# Altium PCB Main.PcbDoc (part 1 of 3)
Units mm, origin at the board's own origin, x right, y up, seen from the top; angles counter-clockwise.
Board outline 231.52 x 36.7 mm, 2 copper layers (Top Layer, Bottom Layer); 134 components, 130 nets, 558 pads, 347 vias.
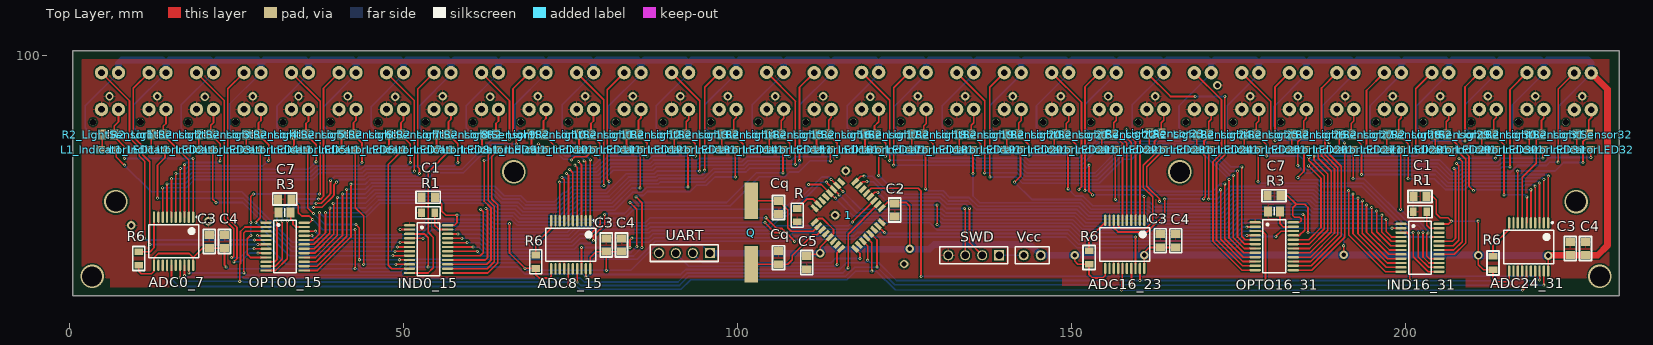
[diagram p0: Top Layer view]
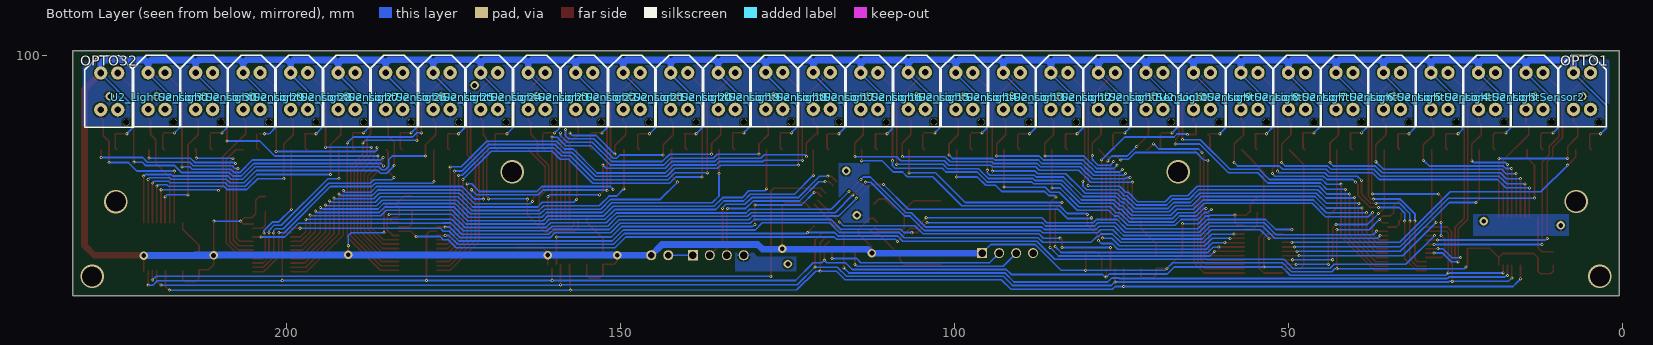
[diagram p1: Bottom Layer view, seen from below]
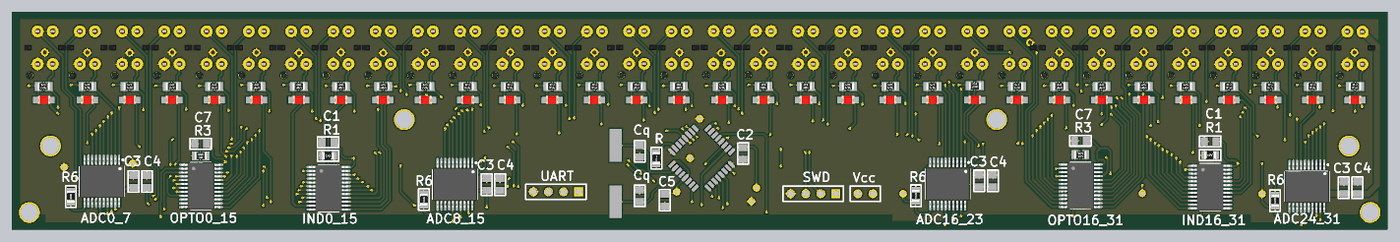
[diagram p3: 3D render of the assembled board from above, using the file's embedded part models]
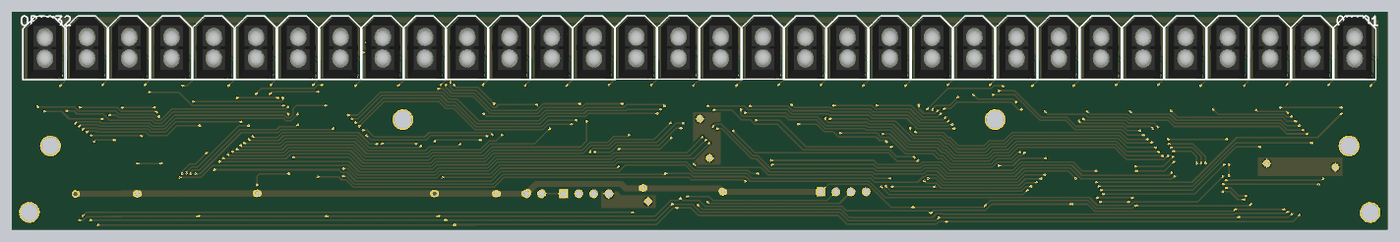
[diagram p4: 3D render of the assembled board from below, using the file's embedded part models]

## Layer stack, top to bottom
Top Solder: solder mask 0.0102, Solder Resist, Dk 3.5
Top Layer: signal copper 0.0356
Dielectric 1: dielectric 0.32, FR-4, Dk 4.8
Bottom Layer: signal copper 0.0356
Bottom Solder: solder mask 0.0102, Solder Resist, Dk 3.5

## Board outline
0.508,64.008 0.508,100.711 232.029,100.711 232.029,64.008

## Design rules (kind name [scope] priority, off if disabled: settings)
Clearance [All] p1: gap=0.254 ignorepadtopadclearanceinfootprint=TRUE
ComponentClearance ComponentClearance_1 [HasFootprint('TCRT5000_NO_HOLE') vs HasFootprint('TCRT5000_NO_HOLE')] p1: gap=0 collisioncheckmode=3 verticalgap=0.254 showdistances=FALSE
ComponentClearance [All] p2: gap=0.254 collisioncheckmode=3 verticalgap=0.254 showdistances=FALSE
HoleSize [All] p1: absolutevalues=TRUE maxlimit=5 minlimit=0.2 maxpercent=80.000 minpercent=20.000
MinimumAnnularRing [All] p1: minimumring=0.1
MinimumSolderMaskSliver [All] p1: minsoldermaskwidth=0
PolygonConnect [All] p1: connectstyle=Relief reliefconductorwidth=0.254 reliefentries=4 polygonreliefangle="90 Angle" airgapwidth=0.254
RoutingVias [All] p1: holewidth=0.2 width=0.45 viastyle="Through Hole" minholewidth=0.2 minwidth=0.45 maxholewidth=100 maxwidth=100
SilkToSilkClearance [All] p1: silktosilkclearance=0
SilkToSolderMaskClearance [IsPad] p1: minsilkscreentomaskgap=0 clearancetoexposedcopper=TRUE
SolderMaskExpansion [All] p1: expansion=0.102
Width [All] p1: maxlimit=1 minlimit=0.254 preferedwidth=0.254
25 further rules are at their usual default settings.

## Classes and differential pairs
channel class SensorControl: OPTO0_15 OPTO16_31
channel class LightSensors: LightSensor1 LightSensor2 LightSensor3 LightSensor4 LightSensor5 LightSensor6 LightSensor7 LightSensor8 LightSensor9 LightSensor10 LightSensor11 LightSensor12 LightSensor13 LightSensor14 LightSensor15 LightSensor16 LightSensor17 LightSensor18 LightSensor19 LightSensor20 LightSensor21 LightSensor22 LightSensor23 LightSensor24 LightSensor25 LightSensor26 LightSensor27 LightSensor28 LightSensor29 LightSensor30 LightSensor31 LightSensor32
channel class IndicatorLEDs: IndicatorLED1 IndicatorLED2 IndicatorLED3 IndicatorLED4 IndicatorLED5 IndicatorLED6 IndicatorLED7 IndicatorLED8 IndicatorLED9 IndicatorLED10 IndicatorLED11 IndicatorLED12 IndicatorLED13 IndicatorLED14 IndicatorLED15 IndicatorLED16 IndicatorLED17 IndicatorLED18 IndicatorLED19 IndicatorLED20 IndicatorLED21 IndicatorLED22 IndicatorLED23 IndicatorLED24 IndicatorLED25 IndicatorLED26 IndicatorLED27 IndicatorLED28 IndicatorLED29 IndicatorLED30 IndicatorLED31 IndicatorLED32
channel class IndicatorControl: IND0_15 IND16_31
channel class ADCs: ADC0_7 ADC8_15 ADC16_23 ADC24_31
net class SENS[1..32]: SENS1 SENS2 SENS3 SENS4 SENS5 SENS6 SENS7 SENS8 SENS9 SENS10 SENS11 SENS12 SENS13 SENS14 SENS15 SENS16 SENS17 SENS18 SENS19 SENS20 SENS21 SENS22 SENS23 SENS24 SENS25 SENS26 SENS27 SENS28 SENS29 SENS30 SENS31 SENS32
net class LED_SENS[1..32]: LED_SENS1 LED_SENS2 LED_SENS3 LED_SENS4 LED_SENS5 LED_SENS6 LED_SENS7 LED_SENS8 LED_SENS9 LED_SENS10 LED_SENS11 LED_SENS12 LED_SENS13 LED_SENS14 LED_SENS15 LED_SENS16 LED_SENS17 LED_SENS18 LED_SENS19 LED_SENS20 LED_SENS21 LED_SENS22 LED_SENS23 LED_SENS24 LED_SENS25 LED_SENS26 LED_SENS27 LED_SENS28 LED_SENS29 LED_SENS30 LED_SENS31 LED_SENS32
net class LED_IND[1..32]: LED_IND1 LED_IND2 LED_IND3 LED_IND4 LED_IND5 LED_IND6 LED_IND7 LED_IND8 LED_IND9 LED_IND10 LED_IND11 LED_IND12 LED_IND13 LED_IND14 LED_IND15 LED_IND16 LED_IND17 LED_IND18 LED_IND19 LED_IND20 LED_IND21 LED_IND22 LED_IND23 LED_IND24 LED_IND25 LED_IND26 LED_IND27 LED_IND28 LED_IND29 LED_IND30 LED_IND31 LED_IND32
component class OPTO16_31: OPTO16_31
component class OPTO0_15: C7 OPTO0_15 R3
component class microcontroller: 1 C2 C5 C_quartz2 Cq Q R SWD UART Vcc
component class LightSensor32: OPTO32 R2_LightSensor32
component class LightSensor31: R2_LightSensor31 U2_LightSensor31
component class LightSensor30: R2_LightSensor30 U2_LightSensor30
component class LightSensor29: R2_LightSensor29 U2_LightSensor29
component class LightSensor28: R2_LightSensor28 U2_LightSensor28
component class LightSensor27: R2_LightSensor27 U2_LightSensor27
component class LightSensor26: R2_LightSensor26 U2_LightSensor26
component class LightSensor25: R2_LightSensor25 U2_LightSensor25
component class LightSensor24: R2_LightSensor24 U2_LightSensor24
component class LightSensor23: R2_LightSensor23 U2_LightSensor23
component class LightSensor22: R2_LightSensor22 U2_LightSensor22
component class LightSensor21: R2_LightSensor21 U2_LightSensor21
component class LightSensor20: R2_LightSensor20 U2_LightSensor20
component class LightSensor19: R2_LightSensor19 U2_LightSensor19
component class LightSensor18: R2_LightSensor18 U2_LightSensor18
component class LightSensor17: R2_LightSensor17 U2_LightSensor17
component class LightSensor16: R2_LightSensor16 U2_LightSensor16
component class LightSensor15: R2_LightSensor15 U2_LightSensor15
component class LightSensor14: R2_LightSensor14 U2_LightSensor14
component class LightSensor13: R2_LightSensor13 U2_LightSensor13
component class LightSensor12: R2_LightSensor12 U2_LightSensor12
component class LightSensor11: R2_LightSensor11 U2_LightSensor11
component class LightSensor10: R2_LightSensor10 U2_LightSensor10
component class LightSensor9: R2_LightSensor9 U2_LightSensor9
component class LightSensor8: R2_LightSensor8 U2_LightSensor8
component class LightSensor7: R2_LightSensor7 U2_LightSensor7
component class LightSensor6: R2_LightSensor6 U2_LightSensor6
component class LightSensor5: R2_LightSensor5 U2_LightSensor5
component class LightSensor4: R2_LightSensor4 U2_LightSensor4
component class LightSensor3: R2_LightSensor3 U2_LightSensor3
component class LightSensor2: R2_LightSensor2 U2_LightSensor2
component class LightSensor1: OPTO1 R2_LightSensor1
component class IndicatorLED32: L1_IndicatorLED32
component class IndicatorLED31: L1_IndicatorLED31
component class IndicatorLED30: L1_IndicatorLED30
component class IndicatorLED29: L1_IndicatorLED29
component class IndicatorLED28: L1_IndicatorLED28
component class IndicatorLED27: L1_IndicatorLED27
component class IndicatorLED26: L1_IndicatorLED26
component class IndicatorLED25: L1_IndicatorLED25
component class IndicatorLED24: L1_IndicatorLED24
component class IndicatorLED23: L1_IndicatorLED23
component class IndicatorLED22: L1_IndicatorLED22
component class IndicatorLED21: L1_IndicatorLED21
component class IndicatorLED20: L1_IndicatorLED20
component class IndicatorLED19: L1_IndicatorLED19
component class IndicatorLED18: L1_IndicatorLED18
component class IndicatorLED17: L1_IndicatorLED17
component class IndicatorLED16: L1_IndicatorLED16
component class IndicatorLED15: L1_IndicatorLED15
component class IndicatorLED14: L1_IndicatorLED14
component class IndicatorLED13: L1_IndicatorLED13
component class IndicatorLED12: L1_IndicatorLED12
component class IndicatorLED11: L1_IndicatorLED11
component class IndicatorLED10: L1_IndicatorLED10
component class IndicatorLED9: L1_IndicatorLED9
component class IndicatorLED8: L1_IndicatorLED8
component class IndicatorLED7: L1_IndicatorLED7
component class IndicatorLED6: L1_IndicatorLED6
component class IndicatorLED5: L1_IndicatorLED5
component class IndicatorLED4: L1_IndicatorLED4
component class IndicatorLED3: L1_IndicatorLED3
component class IndicatorLED2: L1_IndicatorLED2
component class IndicatorLED1: L1_IndicatorLED1
component class IND16_31: IND16_31
component class IND0_15: C1 IND0_15 R1
component class ADC24_31: ADC24_31
component class ADC16_23: ADC16_23
component class ADC8_15: ADC8_15
component class ADC0_7: ADC0_7 C3 C4 R6

## Components (designator, comment, footprint, x,y, rotation, side; value= is the part's Value field where it differs from the comment)
1 "STM32F030" TQFP32-08 116.586,76.073 r45 top
ADC0_7 "MAX1110CAP+" "20-Pin SSOP" 15.625,72.18 r270 top (schematic designator U5)
ADC8_15 "MAX1110CAP+" "20-Pin SSOP" 75.061,71.656 r270 top (schematic designator U5)
ADC16_23 "MAX1110CAP+" "20-Pin SSOP" 157.984,71.711 r270 top (schematic designator U5)
ADC24_31 "MAX1110CAP+" "20-Pin SSOP" 218.444,71.325 r270 top (schematic designator U5)
C1 "100nF" FP_0805_CAP_085 202.184,78.867 r0 top
C1 "100nF" FP_0805_CAP_085 53.721,78.74 r0 top
C2 "100nF" FP_0805_CAP_085 123.571,76.849 r90 top
C3 "100nF" FP_0805_CAP_085 224.663,71.084 r270 top
C3 "100nF" FP_0805_CAP_085 163.322,72.241 r270 top
C3 "100nF" FP_0805_CAP_085 80.391,71.612 r270 top
C3 "100nF" FP_0805_CAP_085 20.955,72.136 r270 top
C4 "1uF" FP_0805_CAP_085 226.949,71.084 r270 top
C4 "1uF" FP_0805_CAP_085 165.608,72.241 r270 top
C4 "1uF" FP_0805_CAP_085 82.677,71.612 r270 top
C4 "1uF" FP_0805_CAP_085 23.241,72.136 r270 top
C5 "100nF" FP_0805_CAP_085 110.379,68.977 r90 top
C7 "100nF" FP_0805_CAP_085 180.34,78.994 r0 top
C7 "100nF" FP_0805_CAP_085 32.258,78.486 r0 top
Cq "22pF" FP_0805_CAP_085 106.172,69.723 r270 top (schematic designator C_quartz2)
Cq "22pF" FP_0805_CAP_085 106.172,77.216 r90 top (schematic designator C_quartz1)
IND0_15 "STP16CP05TTR" "24-Pin TSSOP" 53.792,70.997 r0 top (schematic designator U1)
IND16_31 "STP16CP05TTR" "24-Pin TSSOP" 202.184,71.195 r0 top (schematic designator U1)
L1_IndicatorLED1 "KPT-2012SURCK" 0808-LED 5.874,85.852 r0 top (schematic designator L1)
L1_IndicatorLED2 "KPT-2012SURCK" 0808-LED 13.176,85.852 r0 top (schematic designator L1)
L1_IndicatorLED3 "KPT-2012SURCK" 0808-LED 20.32,85.852 r0 top (schematic designator L1)
L1_IndicatorLED4 "KPT-2012SURCK" 0808-LED 27.432,85.852 r0 top (schematic designator L1)
L1_IndicatorLED5 "KPT-2012SURCK" 0808-LED 34.544,85.852 r0 top (schematic designator L1)
L1_IndicatorLED6 "KPT-2012SURCK" 0808-LED 41.656,85.852 r0 top (schematic designator L1)
L1_IndicatorLED7 "KPT-2012SURCK" 0808-LED 48.768,85.852 r0 top (schematic designator L1)
L1_IndicatorLED8 "KPT-2012SURCK" 0808-LED 55.88,85.852 r0 top (schematic designator L1)
L1_IndicatorLED9 "KPT-2012SURCK" 0808-LED 62.96,85.852 r0 top (schematic designator L1)
L1_IndicatorLED10 "KPT-2012SURCK" 0808-LED 70.104,85.852 r0 top (schematic designator L1)
L1_IndicatorLED11 "KPT-2012SURCK" 0808-LED 77.216,85.852 r0 top (schematic designator L1)
L1_IndicatorLED12 "KPT-2012SURCK" 0808-LED 84.328,85.852 r0 top (schematic designator L1)
L1_IndicatorLED13 "KPT-2012SURCK" 0808-LED 91.44,85.852 r0 top (schematic designator L1)
L1_IndicatorLED14 "KPT-2012SURCK" 0808-LED 98.552,85.852 r0 top (schematic designator L1)
L1_IndicatorLED15 "KPT-2012SURCK" 0808-LED 105.664,85.852 r0 top (schematic designator L1)
L1_IndicatorLED16 "KPT-2012SURCK" 0808-LED 112.776,85.852 r0 top (schematic designator L1)
L1_IndicatorLED17 "KPT-2012SURCK" 0808-LED 120.015,85.852 r0 top (schematic designator L1)
L1_IndicatorLED18 "KPT-2012SURCK" 0808-LED 127,85.852 r0 top (schematic designator L1)
L1_IndicatorLED19 "KPT-2012SURCK" 0808-LED 134.112,85.852 r0 top (schematic designator L1)
L1_IndicatorLED20 "KPT-2012SURCK" 0808-LED 141.224,85.852 r0 top (schematic designator L1)
L1_IndicatorLED21 "KPT-2012SURCK" 0808-LED 148.336,85.852 r0 top (schematic designator L1)
L1_IndicatorLED22 "KPT-2012SURCK" 0808-LED 155.448,85.852 r0 top (schematic designator L1)
L1_IndicatorLED23 "KPT-2012SURCK" 0808-LED 162.56,85.852 r0 top (schematic designator L1)
L1_IndicatorLED24 "KPT-2012SURCK" 0808-LED 169.672,85.852 r0 top (schematic designator L1)
L1_IndicatorLED25 "KPT-2012SURCK" 0808-LED 176.784,85.852 r0 top (schematic designator L1)
L1_IndicatorLED26 "KPT-2012SURCK" 0808-LED 183.896,85.852 r0 top (schematic designator L1)
L1_IndicatorLED27 "KPT-2012SURCK" 0808-LED 191.008,85.852 r0 top (schematic designator L1)
L1_IndicatorLED28 "KPT-2012SURCK" 0808-LED 198.12,85.852 r0 top (schematic designator L1)
L1_IndicatorLED29 "KPT-2012SURCK" 0808-LED 205.359,85.852 r0 top (schematic designator L1)
L1_IndicatorLED30 "KPT-2012SURCK" 0808-LED 212.344,85.852 r0 top (schematic designator L1)
L1_IndicatorLED31 "KPT-2012SURCK" 0808-LED 219.456,85.852 r0 top (schematic designator L1)
L1_IndicatorLED32 "KPT-2012SURCK" 0808-LED 226.568,85.852 r0 top (schematic designator L1)
OPTO0_15 "STP16CP05TTR" "24-Pin TSSOP" 32.314,71.378 r0 top (schematic designator U3)
OPTO1 "TCRT5000" TCRT5000_NO_HOLE 6.2,94.659 r90 bottom (schematic designator U2)
OPTO16_31 "STP16CP05TTR" "24-Pin TSSOP" 180.367,71.425 r0 top (schematic designator U3)
OPTO32 "TCRT5000" TCRT5000_NO_HOLE 226.641,94.615 r90 bottom (schematic designator U2)
Q "" CSM-7X-DU 102.108,73.47 r90 top
R "10K" FP_0805_RES 108.966,76.073 r90 top (schematic designator R_boot)
R1 "8K2" FP_0805_RES 202.184,76.581 r180 top
R1 "8K2" FP_0805_RES 53.721,76.454 r180 top
R2_LightSensor1 "MCMR08X2202FTL" 0805-W 5.842,88.138 r0 top (schematic designator R2)
R2_LightSensor2 "MCMR08X2202FTL" 0805-W 13.197,88.138 r0 top (schematic designator R2)
R2_LightSensor3 "MCMR08X2202FTL" 0805-W 20.309,88.138 r0 top (schematic designator R2)
R2_LightSensor4 "MCMR08X2202FTL" 0805-W 27.421,88.138 r0 top (schematic designator R2)
R2_LightSensor5 "MCMR08X2202FTL" 0805-W 34.533,88.138 r0 top (schematic designator R2)
R2_LightSensor6 "MCMR08X2202FTL" 0805-W 41.645,88.138 r0 top (schematic designator R2)
R2_LightSensor7 "MCMR08X2202FTL" 0805-W 48.757,88.138 r0 top (schematic designator R2)
R2_LightSensor8 "MCMR08X2202FTL" 0805-W 55.88,88.138 r0 top (schematic designator R2)
R2_LightSensor9 "MCMR08X2202FTL" 0805-W 62.992,88.138 r0 top (schematic designator R2)
R2_LightSensor10 "MCMR08X2202FTL" 0805-W 70.093,88.138 r0 top (schematic designator R2)
R2_LightSensor11 "MCMR08X2202FTL" 0805-W 77.205,88.138 r0 top (schematic designator R2)
R2_LightSensor12 "MCMR08X2202FTL" 0805-W 84.317,88.138 r0 top (schematic designator R2)
R2_LightSensor13 "MCMR08X2202FTL" 0805-W 91.44,88.138 r0 top (schematic designator R2)
R2_LightSensor14 "MCMR08X2202FTL" 0805-W 98.552,88.138 r0 top (schematic designator R2)
R2_LightSensor15 "MCMR08X2202FTL" 0805-W 105.664,88.138 r0 top (schematic designator R2)
R2_LightSensor16 "MCMR08X2202FTL" 0805-W 112.765,88.138 r0 top (schematic designator R2)
R2_LightSensor17 "MCMR08X2202FTL" 0805-W 120.004,88.138 r0 top (schematic designator R2)
R2_LightSensor18 "MCMR08X2202FTL" 0805-W 126.989,88.138 r0 top (schematic designator R2)
R2_LightSensor19 "MCMR08X2202FTL" 0805-W 134.112,88.138 r0 top (schematic designator R2)
R2_LightSensor20 "MCMR08X2202FTL" 0805-W 141.213,88.138 r0 top (schematic designator R2)
R2_LightSensor21 "MCMR08X2202FTL" 0805-W 148.325,88.138 r0 top (schematic designator R2)
R2_LightSensor22 "MCMR08X2202FTL" 0805-W 155.437,88.138 r0 top (schematic designator R2)
R2_LightSensor23 "MCMR08X2202FTL" 0805-W 162.56,88.265 r0 top (schematic designator R2)
R2_LightSensor24 "MCMR08X2202FTL" 0805-W 169.672,88.138 r0 top (schematic designator R2)
R2_LightSensor25 "MCMR08X2202FTL" 0805-W 176.773,88.138 r0 top (schematic designator R2)
R2_LightSensor26 "MCMR08X2202FTL" 0805-W 183.896,88.138 r0 top (schematic designator R2)
R2_LightSensor27 "MCMR08X2202FTL" 0805-W 190.997,88.138 r0 top (schematic designator R2)
R2_LightSensor28 "MCMR08X2202FTL" 0805-W 198.109,88.138 r0 top (schematic designator R2)
R2_LightSensor29 "MCMR08X2202FTL" 0805-W 205.359,88.138 r0 top (schematic designator R2)
R2_LightSensor30 "MCMR08X2202FTL" 0805-W 212.333,88.138 r0 top (schematic designator R2)
R2_LightSensor31 "MCMR08X2202FTL" 0805-W 219.445,88.138 r0 top (schematic designator R2)
R2_LightSensor32 "MCMR08X2202FTL" 0805-W 226.557,88.138 r0 top (schematic designator R2)
R3 "CRCW0805806RFKEA" 0805-W 180.34,76.656 r180 top
R3 "CRCW0805806RFKEA" 0805-W 32.258,76.454 r180 top
R6 "1K" FP_0805_RES 213.106,68.909 r270 top
R6 "1K" FP_0805_RES 152.654,69.753 r270 top
R6 "1K" FP_0805_RES 69.85,69.103 r270 top
R6 "1K" FP_0805_RES 10.414,69.596 r270 top
SWD "Connector" FP_CONN4_TUSKE_254MM 139.192,70.078 r90 top
U2_LightSensor2 "TCRT5000" TCRT5000_NO_HOLE 13.308,94.659 r90 bottom (schematic designator U2)
U2_LightSensor3 "TCRT5000" TCRT5000_NO_HOLE 20.42,94.659 r90 bottom (schematic designator U2)
U2_LightSensor4 "TCRT5000" TCRT5000_NO_HOLE 27.532,94.659 r90 bottom (schematic designator U2)
U2_LightSensor5 "TCRT5000" TCRT5000_NO_HOLE 34.644,94.659 r90 bottom (schematic designator U2)
U2_LightSensor6 "TCRT5000" TCRT5000_NO_HOLE 41.756,94.659 r90 bottom (schematic designator U2)
U2_LightSensor7 "TCRT5000" TCRT5000_NO_HOLE 48.868,94.659 r90 bottom (schematic designator U2)
U2_LightSensor8 "TCRT5000" TCRT5000_NO_HOLE 55.98,94.659 r90 bottom (schematic designator U2)
U2_LightSensor9 "TCRT5000" TCRT5000_NO_HOLE 63.092,94.659 r90 bottom (schematic designator U2)
U2_LightSensor10 "TCRT5000" TCRT5000_NO_HOLE 70.204,94.659 r90 bottom (schematic designator U2)
U2_LightSensor11 "TCRT5000" TCRT5000_NO_HOLE 77.316,94.659 r90 bottom (schematic designator U2)
U2_LightSensor12 "TCRT5000" TCRT5000_NO_HOLE 84.428,94.659 r90 bottom (schematic designator U2)
U2_LightSensor13 "TCRT5000" TCRT5000_NO_HOLE 91.54,94.659 r90 bottom (schematic designator U2)
U2_LightSensor14 "TCRT5000" TCRT5000_NO_HOLE 98.652,94.659 r90 bottom (schematic designator U2)
U2_LightSensor15 "TCRT5000" TCRT5000_NO_HOLE 105.764,94.698 r90 bottom (schematic designator U2)
U2_LightSensor16 "TCRT5000" TCRT5000_NO_HOLE 112.876,94.659 r90 bottom (schematic designator U2)
U2_LightSensor17 "TCRT5000" TCRT5000_NO_HOLE 119.988,94.698 r90 bottom (schematic designator U2)
U2_LightSensor18 "TCRT5000" TCRT5000_NO_HOLE 127.1,94.698 r90 bottom (schematic designator U2)
U2_LightSensor19 "TCRT5000" TCRT5000_NO_HOLE 134.212,94.659 r90 bottom (schematic designator U2)
U2_LightSensor20 "TCRT5000" TCRT5000_NO_HOLE 141.324,94.659 r90 bottom (schematic designator U2)
U2_LightSensor21 "TCRT5000" TCRT5000_NO_HOLE 148.436,94.659 r90 bottom (schematic designator U2)
U2_LightSensor22 "TCRT5000" TCRT5000_NO_HOLE 155.548,94.659 r90 bottom (schematic designator U2)
U2_LightSensor23 "TCRT5000" TCRT5000_NO_HOLE 162.66,94.659 r90 bottom (schematic designator U2)
U2_LightSensor24 "TCRT5000" TCRT5000_NO_HOLE 169.772,94.659 r90 bottom (schematic designator U2)
U2_LightSensor25 "TCRT5000" TCRT5000_NO_HOLE 176.884,94.659 r90 bottom (schematic designator U2)
U2_LightSensor26 "TCRT5000" TCRT5000_NO_HOLE 183.996,94.659 r90 bottom (schematic designator U2)
U2_LightSensor27 "TCRT5000" TCRT5000_NO_HOLE 191.108,94.659 r90 bottom (schematic designator U2)
U2_LightSensor28 "TCRT5000" TCRT5000_NO_HOLE 198.22,94.659 r90 bottom (schematic designator U2)
U2_LightSensor29 "TCRT5000" TCRT5000_NO_HOLE 205.332,94.659 r90 bottom (schematic designator U2)
U2_LightSensor30 "TCRT5000" TCRT5000_NO_HOLE 212.444,94.659 r90 bottom (schematic designator U2)
U2_LightSensor31 "TCRT5000" TCRT5000_NO_HOLE 219.556,94.659 r90 bottom (schematic designator U2)
UART "Connector" FP_CONN4_TUSKE_254MM 95.885,70.399 r90 top
Vcc "JUMPER_2" JUMPER_2 144.145,70.078 r180 top (schematic designator *)

## Footprints (in the part's own frame and the unit in brackets; to place one, negate y for a bottom-side part, rotate by r counter-clockwise, add the part's x,y. Pads: shape width x height; smd on the part's side, far side on the other; paste and mask are expansions set on the pad)
"20-Pin SSOP" [mm]
  oval 1.7x0.35 smd mask+0.035: 1(-3.6,2.925) 2(-3.6,2.275) 3(-3.6,1.625) 4(-3.6,0.975) 5(-3.6,0.325) 6(-3.6,-0.325) 7(-3.6,-0.975) 8(-3.6,-1.625) 9(-3.6,-2.275) 10(-3.6,-2.925) 11(3.6,-2.925) 12(3.6,-2.275) 13(3.6,-1.625) 14(3.6,-0.975) 15(3.6,-0.325) 16(3.6,0.325) 17(3.6,0.975) 18(3.6,1.625) 19(3.6,2.275) 20(3.6,2.925)
  silkscreen extent -3.75,-3.75 2.5,3.75, body extent -3.93,-3.75 3.93,3.75, height 2.15
"24-Pin TSSOP" [mm]
  oval 1.7x0.35 smd mask+0.035: 1(-2.85,3.575) 2(-2.85,2.925) 3(-2.85,2.275) 4(-2.85,1.625) 5(-2.85,0.975) 6(-2.85,0.325) 7(-2.85,-0.325) 8(-2.85,-0.975) 9(-2.85,-1.625) 10(-2.85,-2.275) 11(-2.85,-2.925) 12(-2.85,-3.575) 13(2.85,-3.575) 14(2.85,-2.925) 15(2.85,-2.275) 16(2.85,-1.625) 17(2.85,-0.975) 18(2.85,-0.325) 19(2.85,0.325) 20(2.85,0.975) 21(2.85,1.625) 22(2.85,2.275) 23(2.85,2.925) 24(2.85,3.575)
  silkscreen extent -1.7,-3.95 1.7,3.95, body extent -3.27,-3.95 3.28,3.95, height 1.2
0805-W [mm]
  rect 1.2x1.5 smd mask+0.035: 1(-0.9,0) 2(0.9,0)
  silkscreen extent 0,-0.63 0,0.63, body extent -1,-0.62 1,0.63, height 0.45
0808-LED [mm]
  rect 1.25x1.1 smd mask+0.035: A(-1.175,0) K(1.175,0)
  silkscreen extent -0.1,-0.4 0.3,0.4, body extent -1.05,-0.68 1.05,0.68, height 0.9
CSM-7X-DU [mm]
  rect 5.5x2 smd: 1(-4.75,0) 2(4.75,0)
FP_0805_CAP_085 [mm] "0805 kapacitás YAGEO 0.85mm magas"
  rect 1.2x1.4 smd: 1(-1,0) 2(1,0)
  silkscreen extent -1.8,-0.9 1.8,0.9, body extent -1,-0.64 1.03,0.64, height 0.85
FP_0805_RES [mm] "0805 ellenállás"
  rect 1x1.3 smd: 1(-1,0) 2(1,0)
  silkscreen extent -1.8,-0.9 1.8,0.9, body extent -1,-0.62 1,0.63, height 0.62
FP_CONN4_TUSKE_254MM [mm] "4×1 tüskesor"
  rect 1.5x1.5 hole 1.1: 1(0,0)
  round 1.5 hole 1.1: 2(0,2.54) 3(0,5.08) 4(0,7.62)
  silkscreen extent -1.27,-1.27 1.27,8.9, body extent -1.27,-1.27 1.27,8.89, height 8.54
JUMPER_2 [mm]
  round 1.5 hole 1: 1(-1.27,0) 2(1.27,0)
  silkscreen extent -2.54,-1.27 2.54,1.27
TCRT5000_NO_HOLE [mm]
  round 1 hole 1: 1(-4.65,-2.64)
  round 2 hole 1: A(2.75,1.17) C(-2.75,1.17) E(-2.75,-1.37) K(2.75,-1.37)
  silkscreen extent -5.35,-3.75 5.35,3.55, body extent -5.1,-3.65 5.1,3.35, height 7.02
TQFP32-08 [mil]
  rect 50x22 smd: 1(-169,110.24) 2(-169,78.74) 3(-169,47.24) 4(-169,15.75) 5(-169,-15.75) 6(-169,-47.24) 7(-169,-78.74) 8(-169,-110.24) 17(169,-110.24) 18(169,-78.74) 19(169,-47.24) 20(169,-15.75) 21(169,15.75) 22(169,47.24) 23(169,78.74) 24(169,110.24)
  rect 22x50 smd: 9(-110.24,-169) 10(-78.74,-169) 11(-47.24,-169) 12(-15.75,-169) 13(15.75,-169) 14(47.24,-169) 15(78.74,-169) 16(110.24,-169) 25(110.24,169) 26(78.74,169) 27(47.24,169) 28(15.75,169) 29(-15.75,169) 30(-47.24,169) 31(-78.74,169) 32(-110.24,169)

## Part data
1: Package=TQFP32-08, DeviceSetName=STM32F030, GateName_1=G$1, LibraryName=stm32F030x, SymbolName_1=STM32F030X
ADC0_7 ADC8_15 ADC16_23 ADC24_31: "Analogue to Digital Converter, Low Power, 8 bit, 50 kSPS, Single, 2.7 V, 5.5 V, SSOP"
C1 C1 C2 C3 C3 C3 C3 C5 C7 C7: library part "CAP 100nF", "Capacitor", Tolerance=+80%/-20%, Voltage=25V, Name="SMD Multilayer Ceramic Capacitor, 0805", Reference=1759167, Supplier=Farnell
C4 C4 C4 C4: library part "CAP 1uF", "Capacitor", Tolerance=+80%/-20%, Voltage=25V, Name="SMD Multilayer Ceramic Capacitor, 0805", Reference=1828853, Supplier=Farnell
Cq Cq: library part "CAP 22pF", "Capacitor", Tolerance=5%, Voltage=50V, Name="SMD Multilayer Ceramic Capacitor, 0805", Reference=1759195, Supplier=Farnell
IND0_15 IND16_31 OPTO0_15 OPTO16_31: "Led Driver, 16 Outputs, Constant Current, 3V-5.5V in, 30MHz switch, 20V/100mA out, TSSOP-24"
L1_IndicatorLED1 L1_IndicatorLED2 L1_IndicatorLED3 L1_IndicatorLED4 L1_IndicatorLED5 L1_IndicatorLED6 L1_IndicatorLED7 L1_IndicatorLED8 L1_IndicatorLED9 L1_IndicatorLED10 L1_IndicatorLED11 L1_IndicatorLED12 L1_IndicatorLED13 L1_IndicatorLED14 L1_IndicatorLED15 L1_IndicatorLED16 L1_IndicatorLED17 L1_IndicatorLED18 L1_IndicatorLED19 L1_IndicatorLED20 L1_IndicatorLED21 L1_IndicatorLED22 L1_IndicatorLED23 L1_IndicatorLED24 L1_IndicatorLED25 L1_IndicatorLED26 L1_IndicatorLED27 L1_IndicatorLED28 L1_IndicatorLED29 L1_IndicatorLED30 L1_IndicatorLED31 L1_IndicatorLED32: "LED, Low Power, Red, SMD, 2 mA, 1.95 V, 630 nm"
OPTO1 OPTO32 U2_LightSensor2 U2_LightSensor3 U2_LightSensor4 U2_LightSensor5 U2_LightSensor6 U2_LightSensor7 U2_LightSensor8 U2_LightSensor9 U2_LightSensor10 U2_LightSensor11 U2_LightSensor12 U2_LightSensor13 U2_LightSensor14 U2_LightSensor15 U2_LightSensor16 U2_LightSensor17 U2_LightSensor18 U2_LightSensor19 U2_LightSensor20 U2_LightSensor21 U2_LightSensor22 U2_LightSensor23 U2_LightSensor24 U2_LightSensor25 U2_LightSensor26 U2_LightSensor27 U2_LightSensor28 U2_LightSensor29 U2_LightSensor30 U2_LightSensor31: "Reflective Photo Interrupter, Phototransistor, Through Hole, 15 mm, 60 mA, 5 Vr, 1.25 Vf"
Q: library part CSM-7X-DU, DeviceSetName=CSM-7X-DU, GateName_1=P, LibraryName=crystal, OC_FARNELL=unknown, OC_NEWARK=unknown, Package=CSM-7X-DU, SymbolName_1=Q
R: library part "RES 10K", "Resistor", Power=125mW, Tolerance=5%, Name="YAGEO (PHYCOMP)  RC0805JR-0710KL  SMD Chip Resistor, Thick Film, 10 kohm", Reference=9234136, Supplier=Farnell
R1 R1: library part "RES 8K2", "Resistor", Power=125mW, Tolerance=5%, Name="YAGEO (PHYCOMP)  RC0805JR-078K2L  SMD Chip Resistor, Thick Film, 8.2 kohm", Reference=9234128, Supplier=Farnell
R2_LightSensor1 R2_LightSensor2 R2_LightSensor3 R2_LightSensor4 R2_LightSensor5 R2_LightSensor6 R2_LightSensor7 R2_LightSensor8 R2_LightSensor9 R2_LightSensor10 R2_LightSensor11 R2_LightSensor12 R2_LightSensor13 R2_LightSensor14 R2_LightSensor15 R2_LightSensor16 R2_LightSensor17 R2_LightSensor18 R2_LightSensor19 R2_LightSensor20 R2_LightSensor21 R2_LightSensor22 R2_LightSensor23 R2_LightSensor24 R2_LightSensor25 R2_LightSensor26 R2_LightSensor27 R2_LightSensor28 R2_LightSensor29 R2_LightSensor30 R2_LightSensor31 R2_LightSensor32: "SMD Chip Resistor, Ceramic, 22 kohm, MCMR Series, 150 V, Thick Film, 0805 [2012 Metric], 125 mW", Resistance="22 kohm"
R3 R3: "RES, THICK FILM, 806R, 1%, 0.125W, 0805", Resistance="800 ohm"
R6 R6 R6 R6: library part "RES 1K", "Resistor", Power=125mW, Tolerance=5%, Name="YAGEO (PHYCOMP)  RC0805JR-071KL  SMD Chip Resistor, Thick Film, 1 kohm", Reference=9234004, Supplier=Farnell
SWD UART: library part Connector_4pin, "4pin Connector"

## Via types
v1: diameter 0.45, hole 0.2, Top Layer to Bottom Layer, 297 vias
v2: diameter 1.27, hole 0.711, Top Layer to Bottom Layer, 44 vias
v3: diameter 3.5, hole 3, Top Layer to Bottom Layer, 6 vias

## Nets (pads, with @x,y where several pads share a name; then routed paths per layer and width w, separated by ;. In a path a pad name is that pad's centre, name@x,y a point inside that pad or via, vN(x,y) a via of type N, cw(c..) or ccw(c..) an arc to the next point about the centre after c; other vN are vias at no path point)
3V3: 1.1 1.5 1.17 ADC0_7.11 ADC0_7.20 ADC8_15.11 ADC8_15.20 ADC16_23.11 ADC16_23.20 ADC24_31.11 ADC24_31.20 C1.2 C2.2 C3.2 C4.2 C5.2 C7.2 IND0_15.24 IND16_31.24 L1_IndicatorLED1.A L1_IndicatorLED2.A L1_IndicatorLED3.A L1_IndicatorLED4.A L1_IndicatorLED5.A L1_IndicatorLED6.A L1_IndicatorLED7.A L1_IndicatorLED8.A L1_IndicatorLED9.A L1_IndicatorLED10.A L1_IndicatorLED11.A L1_IndicatorLED12.A L1_IndicatorLED13.A L1_IndicatorLED14.A L1_IndicatorLED15.A L1_IndicatorLED16.A L1_IndicatorLED17.A L1_IndicatorLED18.A L1_IndicatorLED19.A L1_IndicatorLED20.A L1_IndicatorLED21.A L1_IndicatorLED22.A L1_IndicatorLED23.A L1_IndicatorLED24.A L1_IndicatorLED25.A L1_IndicatorLED26.A L1_IndicatorLED27.A L1_IndicatorLED28.A L1_IndicatorLED29.A L1_IndicatorLED30.A L1_IndicatorLED31.A L1_IndicatorLED32.A OPTO0_15.24 OPTO1.A OPTO16_31.24 OPTO32.A R2_LightSensor1.1 R2_LightSensor2.1 R2_LightSensor3.1 R2_LightSensor4.1 R2_LightSensor5.1 R2_LightSensor6.1 R2_LightSensor7.1 R2_LightSensor8.1 R2_LightSensor9.1 R2_LightSensor10.1 R2_LightSensor11.1 R2_LightSensor12.1 R2_LightSensor13.1 R2_LightSensor14.1 R2_LightSensor15.1 R2_LightSensor16.1 R2_LightSensor17.1 R2_LightSensor18.1 R2_LightSensor19.1 R2_LightSensor20.1 R2_LightSensor21.1 R2_LightSensor22.1 R2_LightSensor23.1 R2_LightSensor24.1 R2_LightSensor25.1 R2_LightSensor26.1 R2_LightSensor27.1 R2_LightSensor28.1 R2_LightSensor29.1 R2_LightSensor30.1 R2_LightSensor31.1 R2_LightSensor32.1 R6.2 U2_LightSensor2.A U2_LightSensor3.A U2_LightSensor4.A U2_LightSensor5.A U2_LightSensor6.A U2_LightSensor7.A U2_LightSensor8.A U2_LightSensor9.A U2_LightSensor10.A U2_LightSensor11.A U2_LightSensor12.A U2_LightSensor13.A U2_LightSensor14.A U2_LightSensor15.A U2_LightSensor16.A U2_LightSensor17.A U2_LightSensor18.A U2_LightSensor19.A U2_LightSensor20.A U2_LightSensor21.A U2_LightSensor22.A U2_LightSensor23.A U2_LightSensor24.A U2_LightSensor25.A U2_LightSensor26.A U2_LightSensor27.A U2_LightSensor28.A U2_LightSensor29.A U2_LightSensor30.A U2_LightSensor31.A UART.1 Vcc.1 | length 1202.1
  Top Layer w0.254: v1(3.302,88.265) 4.815,88.265 R2_LightSensor1.1@4.942,88.138 4.942,86.095 L1_IndicatorLED1.A@4.699,85.852 ; R6.2@10.414,68.596 10.414,67.698 10.802,67.31 12.32,67.31 12.7,67.69 ADC0_7.11@12.7,68.58 12.7,69.682 13.351,70.333 17.962,70.333 18.55,69.745 ; v1(10.414,88.392) 12.043,88.392 R2_LightSensor2.1@12.297,88.138 12.297,86.148 L1_IndicatorLED2.A@12.001,85.852 ; v1(17.509,88.392) 19.155,88.392 R2_LightSensor3.1@19.409,88.138 19.409,86.116 L1_IndicatorLED3.A@19.145,85.852 ; ADC0_7.20@18.55,68.58 18.55,69.745 ; v1(23.495,68.326) 23.241,68.58 C4.2@23.241,71.136 C3.2@20.955,71.136 19.941,71.136 18.55,69.745 ; v1(24.638,88.265) 26.394,88.265 R2_LightSensor4.1@26.521,88.138 26.521,86.116 L1_IndicatorLED4.A@26.257,85.852 ; v1(32.004,88.265) R2_LightSensor5.1@33.517,88.265 ; C7.2@33.258,78.486 34.29,77.454 34.29,76.454 34.798,75.946 35.941,75.946 v1@36.447,75.44 ; L1_IndicatorLED5.A@33.369,85.852 33.633,86.116 R2_LightSensor5.1@33.633,88.138 ; OPTO0_15.24@35.164,74.953 35.217,74.9 35.265,74.949 35.96,74.949 v1@36.447,75.436 ; v1(39.116,88.392) R2_LightSensor6.1@40.745,88.392 ; L1_IndicatorLED6.A@40.481,85.852 40.745,86.116 R2_LightSensor6.1@40.745,88.138 ; v1(42.799,68.072) v1@42.799,73.854 ; v1(46.211,88.392) R2_LightSensor7.1@47.857,88.392 ; L1_IndicatorLED7.A@47.593,85.852 47.857,86.116 R2_LightSensor7.1@47.857,88.138 ; v1(53.34,88.265) R2_LightSensor8.1@55.096,88.265 ; L1_IndicatorLED8.A@54.705,85.852 54.98,86.127 R2_LightSensor8.1@54.98,88.138 ; C1.2@54.721,78.74 54.737,78.74 55.78,77.697 55.78,76.681 56.388,76.073 v1(58.039,76.073) 58.039,74.93 57.681,74.572 IND0_15.24@56.642,74.572 ; v1(60.325,88.265) R2_LightSensor9.1@61.838,88.265 ; L1_IndicatorLED9.A@61.785,85.852 61.785,87.831 R2_LightSensor9.1@62.092,88.138 ; v1(65.913,74.803) 65.913,70.421 v1(68.22,68.114) 69.777,68.114 69.819,68.072 R6.2@69.85,68.103 69.85,67.183 70.358,66.675 71.882,66.675 72.136,66.929 ADC8_15.11@72.136,68.056 ; v1(67.437,88.392) R2_LightSensor10.1@69.066,88.392 ; L1_IndicatorLED10.A@68.929,85.852 69.193,86.116 R2_LightSensor10.1@69.193,88.138 ; v1(74.532,88.392) R2_LightSensor11.1@76.178,88.392 ; L1_IndicatorLED11.A@76.041,85.852 76.305,86.116 R2_LightSensor11.1@76.305,88.138 ; ADC8_15.20@77.986,68.056 77.986,69.749 78.849,70.612 C3.2@80.391,70.612 ; v1(80.391,67.818) C3.2@80.391,70.612 ; v1(81.661,88.265) R2_LightSensor12.1@83.417,88.265 ; C4.2@82.677,70.612 C3.2@80.391,70.612 ; L1_IndicatorLED12.A@83.153,85.852 83.417,86.116 R2_LightSensor12.1@83.417,88.138 ; v1(88.773,88.265) R2_LightSensor13.1@90.286,88.265 ; L1_IndicatorLED13.A@90.265,85.852 90.54,86.127 R2_LightSensor13.1@90.54,88.138 ; v1(95.885,88.392) R2_LightSensor14.1@97.514,88.392 ; L1_IndicatorLED14.A@97.377,85.852 97.652,86.127 R2_LightSensor14.1@97.652,88.138 ; v1(102.98,88.392) R2_LightSensor15.1@104.626,88.392 ; L1_IndicatorLED15.A@104.489,85.852 104.764,86.127 R2_LightSensor15.1@104.764,88.138 ; v1(110.109,88.265) R2_LightSensor16.1@111.865,88.265 ; C5.2@110.379,69.977 110.622,70.22 112.212,70.22 v2(112.391,70.399) ; 1.1@111.571,75.018 112.118,75.565 112.776,75.565 114.399,73.942 114.399,73.32 1.5@113.834,72.755 112.395,71.316 v2@112.395,70.358 ; L1_IndicatorLED16.A@111.601,85.852 111.865,86.116 R2_LightSensor16.1@111.865,88.138 ; v1(117.348,88.265) R2_LightSensor17.1@118.861,88.265 ; L1_IndicatorLED17.A@118.84,85.852 119.104,86.116 R2_LightSensor17.1@119.104,88.138 ; 1.17@121.601,77.128 122.451,77.978 125.285,77.978 125.825,77.438 v2(125.825,71.053) ; v1(124.46,88.392) R2_LightSensor18.1@126.089,88.392 ; L1_IndicatorLED18.A@125.825,85.852 126.089,86.116 R2_LightSensor18.1@126.089,88.138 ; v1(131.555,88.392) R2_LightSensor19.1@133.201,88.392 ; L1_IndicatorLED19.A@132.937,85.852 133.212,86.127 R2_LightSensor19.1@133.212,88.138 ; v1(138.684,88.265) R2_LightSensor20.1@140.44,88.265 ; L1_IndicatorLED20.A@140.049,85.852 140.313,86.116 R2_LightSensor20.1@140.313,88.138 ; v1(145.669,88.265) R2_LightSensor21.1@147.182,88.265 ; L1_IndicatorLED21.A@147.161,85.852 147.425,86.116 R2_LightSensor21.1@147.425,88.138 ; v2(150.495,70.078) 150.495,69.215 150.957,68.753 R6.2@152.654,68.753 152.654,67.183 153.162,66.675 154.686,66.675 155.067,67.056 ADC16_23.11@155.067,68.685 ; v1(152.781,88.392) R2_LightSensor22.1@154.41,88.392 ; L1_IndicatorLED22.A@154.273,85.852 154.537,86.116 R2_LightSensor22.1@154.537,88.138 ; v1(159.876,88.392) R2_LightSensor23.1@161.522,88.392 ; ADC16_23.20@160.917,68.685 160.917,70.487 161.671,71.241 C3.2@163.322,71.241 C4.2@165.608,71.241 ; L1_IndicatorLED23.A@161.385,85.852 161.66,86.127 R2_LightSensor23.1@161.66,88.265 ; v1(167.005,88.265) R2_LightSensor24.1@168.761,88.265 ; L1_IndicatorLED24.A@168.497,85.852 168.772,86.127 R2_LightSensor24.1@168.772,88.138 ; v1(174.244,88.265) R2_LightSensor25.1@175.757,88.265 ; L1_IndicatorLED25.A@175.609,85.852 175.873,86.116 R2_LightSensor25.1@175.873,88.138 ; C7.2@181.34,78.994 182.356,78.994 183.642,77.708 ; v1(181.356,88.392) R2_LightSensor26.1@182.985,88.392 ; L1_IndicatorLED26.A@182.721,85.852 182.996,86.127 R2_LightSensor26.1@182.996,88.138 ; OPTO16_31.24@183.217,75 184.152,75 184.404,75.252 184.404,75.525 184.149,75.78 183.388,75.78 183.134,76.034 183.134,77.2 183.642,77.708 ; v1(185.42,73.448) 185.42,77.216 184.928,77.708 183.642,77.708 ; v1(188.451,88.392) R2_LightSensor27.1@190.097,88.392 ; L1_IndicatorLED27.A@189.833,85.852 190.097,86.116 R2_LightSensor27.1@190.097,88.138 ; v2(190.754,70.149) v1(190.754,71.501) ; v1(195.58,88.265) R2_LightSensor28.1@197.336,88.265 ; L1_IndicatorLED28.A@196.945,85.852 197.209,86.116 R2_LightSensor28.1@197.209,88.138 ; C1.2@203.184,78.867 204.089,78.867 204.597,78.359 204.597,76.288 205.193,75.692 206.375,75.692 v1(206.883,75.184) 206.469,74.77 IND16_31.24@205.034,74.77 ; v1(203.327,88.265) R2_LightSensor29.1@204.078,88.265 ; L1_IndicatorLED29.A@204.184,85.852 204.459,86.127 R2_LightSensor29.1@204.459,88.138 ; v1(209.677,88.392) R2_LightSensor30.1@211.306,88.392 ; v1(210.895,75.184) 210.895,70.078 v2(210.921,70.052) 210.921,68.681 211.693,67.909 R6.2@213.106,67.909 213.106,66.623 213.614,66.115 215.138,66.115 215.519,66.496 ADC24_31.11@215.519,67.725 ; L1_IndicatorLED30.A@211.169,85.852 211.433,86.116 R2_LightSensor30.1@211.433,88.138 ; v1(216.772,88.392) R2_LightSensor31.1@218.418,88.392 ; L1_IndicatorLED31.A@218.281,85.852 218.545,86.116 R2_LightSensor31.1@218.545,88.138 ; ADC24_31.20@221.369,67.725 221.361,67.733 v2(221.361,70.026) v2@221.393,70.058 ; v1(223.901,88.265) R2_LightSensor32.1@225.657,88.265 ; L1_IndicatorLED32.A@225.393,85.852 225.657,86.116 R2_LightSensor32.1@225.657,88.138
  Top Layer w1: v2@221.361,70.084 221.383,70.074 v2@221.419,70.058 ; v2@221.393,70.058 v2@221.419,70.058 ; OPTO32.A@227.811,97.365 230.251,94.925 230.251,71.546 228.789,70.084 C4.2@226.949,70.084 224.663,70.058 v2@221.419,70.058
  Bottom Layer w0.254: v1(3.302,88.265) 2.413,89.154 2.413,92.452 OPTO1.A@7.37,97.409 ; v1(10.414,88.392) 9.652,89.154 9.652,92.583 U2_LightSensor2.A@14.478,97.409 ; v1(17.509,88.392) 16.764,89.137 16.764,92.583 U2_LightSensor3.A@21.59,97.409 ; v1(23.495,68.326) 23.749,68.072 v1(42.799,68.072) 43.097,68.072 43.563,67.606 49.576,67.606 50.931,68.961 67.373,68.961 v1(68.22,68.114) 68.516,67.818 v1(80.391,67.818) 84.085,67.818 87.953,71.686 94.598,71.686 UART.1@95.885,70.399 ; v1(24.638,88.265) 24.003,88.9 24.003,92.71 U2_LightSensor4.A@28.702,97.409 ; v1(32.004,88.265) 31.115,89.154 31.115,92.452 35.814,97.151 U2_LightSensor5.A@36.072,97.409 ; v1(36.445,75.438) 37.969,73.914 v1(42.799,73.914) ; v1(39.116,88.392) 38.1,89.408 38.1,92.329 42.93,97.159 U2_LightSensor6.A@43.18,97.409 ; v1(46.211,88.392) 45.212,89.391 45.212,92.329 50.038,97.155 U2_LightSensor7.A@50.292,97.409 ; v1(53.34,88.265) 52.459,89.146 52.459,92.464 57.15,97.155 U2_LightSensor8.A@57.404,97.409 ; v1(58.039,76.073) 61.782,76.073 61.896,75.959 62.404,75.959 63.56,74.803 v1(65.913,74.803) ; v1(60.325,88.265) 59.436,89.154 59.436,92.452 64.262,97.278 U2_LightSensor9.A@64.393,97.409 ; v1(67.437,88.392) 66.675,89.154 66.675,92.583 71.374,97.282 U2_LightSensor10.A@71.501,97.409 ; v1(74.532,88.392) 73.787,89.137 73.787,92.583 78.486,97.282 U2_LightSensor11.A@78.613,97.409 ; v1(81.661,88.265) 80.772,89.154 80.772,92.456 85.598,97.282 U2_LightSensor12.A@85.725,97.409 ; v1(88.773,88.265) 87.884,89.154 87.884,92.452 92.71,97.278 U2_LightSensor13.A@92.841,97.409 ; v1(95.885,88.392) 95.123,89.154 95.123,92.583 99.822,97.282 U2_LightSensor14.A@99.949,97.409 ; v1(102.98,88.392) 102.235,89.137 102.235,92.583 106.938,97.286 U2_LightSensor15.A@107.061,97.409 ; v1(110.109,88.265) 109.347,89.027 109.347,92.583 114.046,97.282 U2_LightSensor16.A@114.173,97.409 ; v1(117.348,88.265) 116.459,89.154 116.459,92.452 121.158,97.151 U2_LightSensor17.A@121.416,97.409 ; v1(124.46,88.392) 123.444,89.408 123.444,92.329 128.27,97.155 U2_LightSensor18.A@128.524,97.409 ; v1(131.555,88.392) 130.683,89.264 130.683,92.456 135.382,97.155 U2_LightSensor19.A@135.636,97.409 ; v1(138.684,88.265) 137.795,89.154 137.795,92.456 142.498,97.159 U2_LightSensor20.A@142.748,97.409 ; v1(145.669,88.265) 144.78,89.154 144.78,92.452 149.606,97.278 U2_LightSensor21.A@149.737,97.409 ; v1(152.781,88.392) 152.019,89.154 152.019,92.583 156.718,97.282 U2_LightSensor22.A@156.845,97.409 ; v1(159.876,88.392) 159.131,89.137 159.131,92.583 163.83,97.282 U2_LightSensor23.A@163.957,97.409 ; v1(167.005,88.265) 166.116,89.154 166.116,92.456 170.942,97.282 U2_LightSensor24.A@171.069,97.409 ; v1(174.244,88.265) 173.355,89.154 173.355,92.452 178.054,97.151 U2_LightSensor25.A@178.312,97.409 ; v1(181.356,88.392) 180.34,89.408 180.34,92.329 185.166,97.155 U2_LightSensor26.A@185.42,97.409 ; v1(185.42,73.448) 190.331,73.448 190.754,73.025 v1(190.754,71.501) ; v1(188.451,88.392) 187.579,89.264 187.579,92.456 192.278,97.155 U2_LightSensor27.A@192.532,97.409 ; v1(195.58,88.265) 194.691,89.154 194.691,92.456 199.39,97.155 U2_LightSensor28.A@199.644,97.409 ; v1(203.327,88.265) 202.565,88.265 201.676,89.154 201.676,92.452 206.502,97.278 U2_LightSensor29.A@206.633,97.409 ; v1(206.883,75.184) v1(210.895,75.184) ; v1(209.677,88.392) 208.915,89.154 208.915,92.583 213.618,97.286 U2_LightSensor30.A@213.741,97.409 ; v1(216.772,88.392) 216.027,89.137 216.027,92.583 220.726,97.282 U2_LightSensor31.A@220.853,97.409 ; v1(223.901,88.265) 223.012,89.154 223.012,92.456 227.838,97.282 OPTO32.A@227.965,97.409
  Bottom Layer w1: OPTO1.A@7.37,96.901 OPTO1.A@7.37,97.409 7.37,98.814 7.87,99.314 13.97,99.314 14.478,98.806 ; U2_LightSensor2.A@14.478,96.905 14.478,98.806 ; U2_LightSensor3.A@21.59,96.905 21.59,98.806 ; 28.194,99.314 22.098,99.314 21.59,98.806 ; 28.194,99.318 28.702,98.81 ; U2_LightSensor4.A@28.702,96.905 28.702,98.81 ; U2_LightSensor5.A@35.814,96.905 35.814,97.151 35.814,98.81 ; U2_LightSensor6.A@42.93,96.905 42.93,97.159 42.93,98.814 ; U2_LightSensor7.A@50.038,96.905 50.038,97.155 50.038,98.806 ; U2_LightSensor8.A@57.15,96.905 57.15,97.155 57.15,98.806 ; 63.754,99.314 57.658,99.314 57.15,98.806 ; 63.754,99.318 64.262,98.81 ; U2_LightSensor9.A@64.262,96.905 64.262,97.278 64.262,98.81 ; U2_LightSensor10.A@71.374,96.905 71.374,97.282 71.374,98.81 ; 77.978,99.314 78.486,98.806 ; 77.978,99.318 71.882,99.318 71.374,98.81 ; U2_LightSensor11.A@78.486,96.905 78.486,97.282 78.486,98.806 ; U2_LightSensor12.A@85.598,96.905 85.598,97.282 85.598,98.806 ; 92.202,99.314 86.106,99.314 85.598,98.806 ; 92.202,99.318 92.71,98.81 ; U2_LightSensor13.A@92.71,96.905 92.71,97.278 92.71,98.81 ; UART.1@95.885,70.399 v2(112.391,70.399) ; U2_LightSensor14.A@99.822,96.905 99.822,97.282 99.822,98.81 ; U2_LightSensor15.A@106.938,96.905 106.938,97.286 106.938,98.814 ; v2@112.395,70.358 113.03,70.993 125.765,70.993 v2(125.825,71.053) 125.885,70.993 128.778,70.993 129.471,71.686 143.807,71.686 Vcc.1@145.415,70.078 v2(150.495,70.078) 150.521,70.104 213.715,70.104 ; U2_LightSensor16.A@114.046,96.905 114.046,97.282 114.046,98.806 ; U2_LightSensor17.A@121.158,96.944 121.158,97.151 121.158,98.806 ; 127.762,99.314 121.666,99.314 121.158,98.806 ; 127.762,99.318 128.27,98.81 ; U2_LightSensor18.A@128.27,96.944 128.27,97.155 128.27,98.81 ; U2_LightSensor19.A@135.382,96.905 135.382,97.155 135.382,98.81 ; U2_LightSensor20.A@142.498,96.905 142.498,97.159 142.498,98.814 ; U2_LightSensor21.A@149.606,96.905 149.606,97.278 149.606,98.806 ; U2_LightSensor22.A@156.718,96.905 156.718,97.282 156.718,98.806 ; 163.322,99.314 157.226,99.314 156.718,98.806 ; 163.322,99.318 163.83,98.81 ; U2_LightSensor23.A@163.83,96.905 163.83,97.282 163.83,98.81 ; U2_LightSensor24.A@170.942,96.905 170.942,97.282 170.942,98.81 ; U2_LightSensor25.A@178.054,96.905 178.054,97.151 178.054,98.81 ; 184.658,99.314 185.166,98.806 ; 184.658,99.318 178.562,99.318 178.054,98.81 ; U2_LightSensor26.A@185.166,96.905 185.166,97.155 185.166,98.806 ; U2_LightSensor27.A@192.278,96.905 192.278,97.155 192.278,98.806 ; 198.882,99.314 192.786,99.314 192.278,98.806 ; 198.882,99.318 199.39,98.81 ; U2_LightSensor28.A@199.39,96.905 199.39,97.155 199.39,98.81 ; U2_LightSensor29.A@206.502,96.905 206.502,97.278 206.502,98.81 ; v2(210.921,70.052) 221.335,70.052 v2(221.361,70.026) ; U2_LightSensor30.A@213.618,96.905 213.618,97.286 213.618,98.814 ; U2_LightSensor31.A@220.726,96.905 220.726,97.282 220.726,98.806 ; OPTO32.A@227.838,96.901 227.838,97.282 227.838,98.806 227.33,99.314 221.234,99.314 220.726,98.806 ; 14.478,98.806 14.986,99.314 21.082,99.314 21.59,98.806 ; 28.702,98.81 29.21,99.318 35.306,99.318 35.814,98.81 ; 35.814,98.81 36.322,99.318 42.426,99.318 42.93,98.814 ; 42.93,98.814 43.43,99.314 49.53,99.314 50.038,98.806 ; 50.038,98.806 50.546,99.314 56.642,99.314 57.15,98.806 ; 64.262,98.81 64.77,99.318 70.866,99.318 71.374,98.81 ; 78.486,98.806 78.994,99.314 85.09,99.314 85.598,98.806 ; 92.71,98.81 93.218,99.318 99.314,99.318 99.822,98.81 ; 99.822,98.81 100.33,99.318 106.434,99.318 106.938,98.814 ; 106.938,98.814 107.438,99.314 113.538,99.314 114.046,98.806 ; 114.046,98.806 114.554,99.314 120.65,99.314 121.158,98.806 ; 128.27,98.81 128.778,99.318 134.874,99.318 135.382,98.81 ; 135.382,98.81 135.89,99.318 141.994,99.318 142.498,98.814 ; 142.498,98.814 142.998,99.314 149.098,99.314 149.606,98.806 ; 149.606,98.806 150.114,99.314 156.21,99.314 156.718,98.806 ; 163.83,98.81 164.338,99.318 170.434,99.318 170.942,98.81 ; 170.942,98.81 171.45,99.318 177.546,99.318 178.054,98.81 ; 185.166,98.806 185.674,99.314 191.77,99.314 192.278,98.806 ; 199.39,98.81 199.898,99.318 205.994,99.318 206.502,98.81 ; 206.502,98.81 207.01,99.318 213.114,99.318 213.618,98.814 ; 213.618,98.814 214.118,99.314 220.218,99.314 220.726,98.806
  other v2: 160.909,70.103
GND: 1.16 1.32 ADC0_7.9 ADC0_7.13 ADC0_7.14 ADC8_15.9 ADC8_15.13 ADC8_15.14 ADC16_23.9 ADC16_23.13 ADC16_23.14 ADC24_31.9 ADC24_31.13 ADC24_31.14 C1.1 C2.1 C3.1 C4.1 C5.1 C7.1 Cq.1 IND0_15.1 IND16_31.1 OPTO0_15.1 OPTO1.E OPTO16_31.1 OPTO32.E R1.2 R3.2 R.1 SWD.4 U2_LightSensor2.E U2_LightSensor3.E U2_LightSensor4.E U2_LightSensor5.E U2_LightSensor6.E U2_LightSensor7.E U2_LightSensor8.E U2_LightSensor9.E U2_LightSensor10.E U2_LightSensor11.E U2_LightSensor12.E U2_LightSensor13.E U2_LightSensor14.E U2_LightSensor15.E U2_LightSensor16.E U2_LightSensor17.E U2_LightSensor18.E U2_LightSensor19.E U2_LightSensor20.E U2_LightSensor21.E U2_LightSensor22.E U2_LightSensor23.E U2_LightSensor24.E U2_LightSensor25.E U2_LightSensor26.E U2_LightSensor27.E U2_LightSensor28.E U2_LightSensor29.E U2_LightSensor30.E U2_LightSensor31.E UART.4
  other v2: 124.968,68.77 9.293,74.549 20.828,75.184 114.623,76.073 116.241,82.699 20.32,93.769 48.804,93.769 62.992,93.769 119.888,93.769 6.031,93.853 13.183,93.853 27.472,93.853 34.322,93.853 41.656,93.853 70.127,93.853 98.552,93.853 105.664,93.853 112.842,93.853 141.224,93.853 155.497,93.853 162.56,93.853 183.896,93.853 226.472,93.853 55.88,93.882 77.251,93.882 84.385,93.882 91.486,93.882 127,93.882 134.112,93.882 148.405,93.882 176.784,93.882 191.008,93.882 198.12,93.882 205.232,93.882 212.344,93.882 219.456,93.882 171.856,95.504
LE_IND: 1.27 IND0_15.4 IND16_31.4 | length 159.3
  Top Layer w0.254: IND0_15.4@50.942,72.622 v1(52.959,72.622) ; v1(113.33,81.026) 1.27@114.399,79.957 v1(115.235,79.121) ; v1(197.119,75.453) 197.119,73.632 197.931,72.82 IND16_31.4@199.334,72.82
  Bottom Layer w0.254: v1(52.959,72.622) 54.251,73.914 61.576,73.914 62.973,72.517 74.95,72.517 76.347,73.914 78.156,73.914 78.635,73.435 86.828,73.435 87.18,73.787 104.543,73.787 106.702,75.946 107.493,75.946 112.573,81.026 v1(113.33,81.026) ; v1(115.235,79.121) 117.902,76.454 130.469,76.454 131.027,75.896 150.465,75.896 151.919,74.442 160.259,74.442 160.963,73.738 173.564,73.738 175.278,75.453 v1(197.119,75.453)
LE_OPTO: 1.15 OPTO0_15.4 OPTO16_31.4 | length 157.5
  Top Layer w0.254: v1(28.194,72.999) 28.198,73.003 OPTO0_15.4@29.464,73.003 ; 1.15@121.036,74.452 121.065,74.452 v1(122.047,73.47) ; v1(176.276,73.041) OPTO16_31.4@177.517,73.041
  Bottom Layer w0.254: v1(28.194,72.999) 32.473,68.72 43.167,68.72 43.773,68.114 49.366,68.114 50.721,69.469 85.017,69.469 87.742,72.194 107.752,72.194 108.52,72.962 117.452,72.962 117.96,73.47 v1(122.047,73.47) 122.189,73.328 149.441,73.328 151.063,71.706 174.405,71.706 175.741,73.041 v1(176.276,73.041)
LED_IND1: IND0_15.5 L1_IndicatorLED1.K | length 50.3
  Top Layer w0.254: L1_IndicatorLED1.K@7.049,85.852 7.049,84.779 v1(8.255,83.573) ; v1(49.53,72.009) 50.905,72.009 IND0_15.5@50.942,71.972
  Bottom Layer w0.254: v1(8.255,83.573) 12.267,79.561 25.849,79.561 33.404,72.006 49.527,72.006 v1(49.53,72.009)
LED_IND2: IND0_15.6 L1_IndicatorLED2.K | length 48.5
  Top Layer w0.254: v1(13.208,78.613) 13.208,83.566 14.351,84.709 L1_IndicatorLED2.K@14.351,85.852 ; v1(49.149,71.322) IND0_15.6@50.942,71.322
  Bottom Layer w0.254: v1(13.208,78.613) 26.079,78.613 33.347,71.345 49.126,71.345 v1(49.149,71.322)
LED_IND3: IND0_15.7 L1_IndicatorLED3.K | length 40.1
  Top Layer w0.254: L1_IndicatorLED3.K@21.495,85.852 21.495,78.454 v1(21.971,77.978) ; v1(48.768,70.672) IND0_15.7@50.942,70.672
  Bottom Layer w0.254: v1(21.971,77.978) 25.995,77.978 33.301,70.672 v1(48.768,70.672)
LED_IND4: IND0_15.8 L1_IndicatorLED4.K | length 36.2
  Top Layer w0.254: v1(27.94,75) 28.607,75.667 L1_IndicatorLED4.K@28.607,85.852 ; v1(48.433,70.012) 50.932,70.012 IND0_15.8@50.942,70.022
  Bottom Layer w0.254: v1(27.94,75) 32.928,70.012 v1(48.433,70.012)
LED_IND5: IND0_15.9 L1_IndicatorLED5.K | length 29.9
  Top Layer w0.254: L1_IndicatorLED5.K@35.719,85.852 35.719,77.14 36.532,76.327 v1(36.576,76.327) ; v1(42.926,74.676) 43.434,74.168 v1(43.434,69.406) ; v1(49.403,69.406) 50.909,69.406 IND0_15.9@50.942,69.372
  Bottom Layer w0.254: v1(36.576,76.327) 38.227,74.676 v1(42.926,74.676) ; v1(43.434,69.406) v1(49.403,69.406)
LED_IND6: IND0_15.10 L1_IndicatorLED6.K | length 24.5
  Top Layer w0.254: L1_IndicatorLED6.K@42.831,85.852 42.831,77.186 44.069,75.948 v1(44.069,68.72) ; v1(48.895,68.72) 48.897,68.722 IND0_15.10@50.942,68.722
  Bottom Layer w0.254: v1(44.069,68.72) v1(48.895,68.72)
LED_IND7: IND0_15.11 L1_IndicatorLED7.K | length 21.6
  Top Layer w0.254: L1_IndicatorLED7.K@49.943,85.852 47.752,83.661 47.752,68.58 48.26,68.072 IND0_15.11@50.942,68.072
LED_IND8: IND0_15.12 L1_IndicatorLED8.K | length 23.2
  Top Layer w0.254: IND0_15.12@50.942,67.422 53.706,67.422 54.483,68.199 54.483,72.747 53.721,73.509 53.721,82.518 L1_IndicatorLED8.K@57.055,85.852
LED_IND9: IND0_15.13 L1_IndicatorLED9.K | length 25.8
  Top Layer w0.254: IND0_15.13@56.642,67.422 62.636,67.422 64.135,68.921 64.135,77.589 63.246,78.478 63.246,84.868 64.135,85.757 L1_IndicatorLED9.K@64.135,85.852
LED_IND10: IND0_15.14 L1_IndicatorLED10.K | length 33.4
  Top Layer w0.254: IND0_15.14@56.642,68.072 62.567,68.072 63.627,69.132 63.627,77.378 62.738,78.267 62.738,85.091 62.992,85.345 v1(62.992,85.471) ; v1(70.231,86.752) 71.131,85.852 L1_IndicatorLED10.K@71.279,85.852
  Bottom Layer w0.254: v1(62.992,85.471) 63.5,85.979 69.458,85.979 v1(70.231,86.752)
LED_IND11: IND0_15.15 L1_IndicatorLED11.K | length 40
  Top Layer w0.254: IND0_15.15@56.642,68.722 62.499,68.722 63.119,69.342 63.119,77.168 62.092,78.195 62.103,78.206 v1(62.103,84.296) ; v1(75.184,84.328) 75.692,84.836 77.375,84.836 L1_IndicatorLED11.K@78.391,85.852
  Bottom Layer w0.254: v1(62.103,84.296) 62.674,84.296 63.849,85.471 72.942,85.471 73.987,84.426 75.086,84.426 v1(75.184,84.328)
LED_IND12: IND0_15.16 L1_IndicatorLED12.K | length 45.4
  Top Layer w0.254: IND0_15.16@56.642,69.372 62.26,69.372 62.611,69.723 62.611,76.819 v1(62.357,77.073) ; v1(85.471,80.137) 85.471,85.82 L1_IndicatorLED12.K@85.503,85.852
  Bottom Layer w0.254: v1(62.357,77.073) 62.727,77.073 63.854,75.946 66.345,75.946 67.234,75.057 73.898,75.057 75.295,76.454 75.845,76.454 76.734,77.343 81.436,77.343 84.23,80.137 v1(85.471,80.137)
LED_IND13: IND0_15.17 L1_IndicatorLED13.K | length 52.1
  Top Layer w0.254: IND0_15.17@56.642,70.022 61.543,70.022 61.963,70.442 61.963,76.594 v1(61.595,76.962) ; v1(92.615,80.296) L1_IndicatorLED13.K@92.615,85.852
  Bottom Layer w0.254: v1(61.595,76.962) 61.611,76.962 62.106,76.467 62.608,76.467 62.611,76.47 63.644,75.438 66.135,75.438 67.024,74.549 74.108,74.549 75.505,75.946 76.09,75.946 76.979,76.835 81.647,76.835 84.343,79.531 85.722,79.531 86.455,80.264 92.583,80.264 v1(92.615,80.296)
LED_IND14: IND0_15.18 L1_IndicatorLED14.K | length 58
  Top Layer w0.254: IND0_15.18@56.642,70.672 v1(61.087,70.672) ; v1(84.836,78.825) 85.722,77.939 v1(85.722,71.247) ; v1(99.695,81.788) 99.695,85.82 L1_IndicatorLED14.K@99.727,85.852